# Altium PCB CONTOR.PcbDoc
Units mm, origin at the board's own origin, x right, y up, seen from the top; angles counter-clockwise.
Board outline 100 x 60 mm, 2 copper layers (Top Layer, Bottom Layer); 18 components, 11 nets, 70 pads, 1 vias.
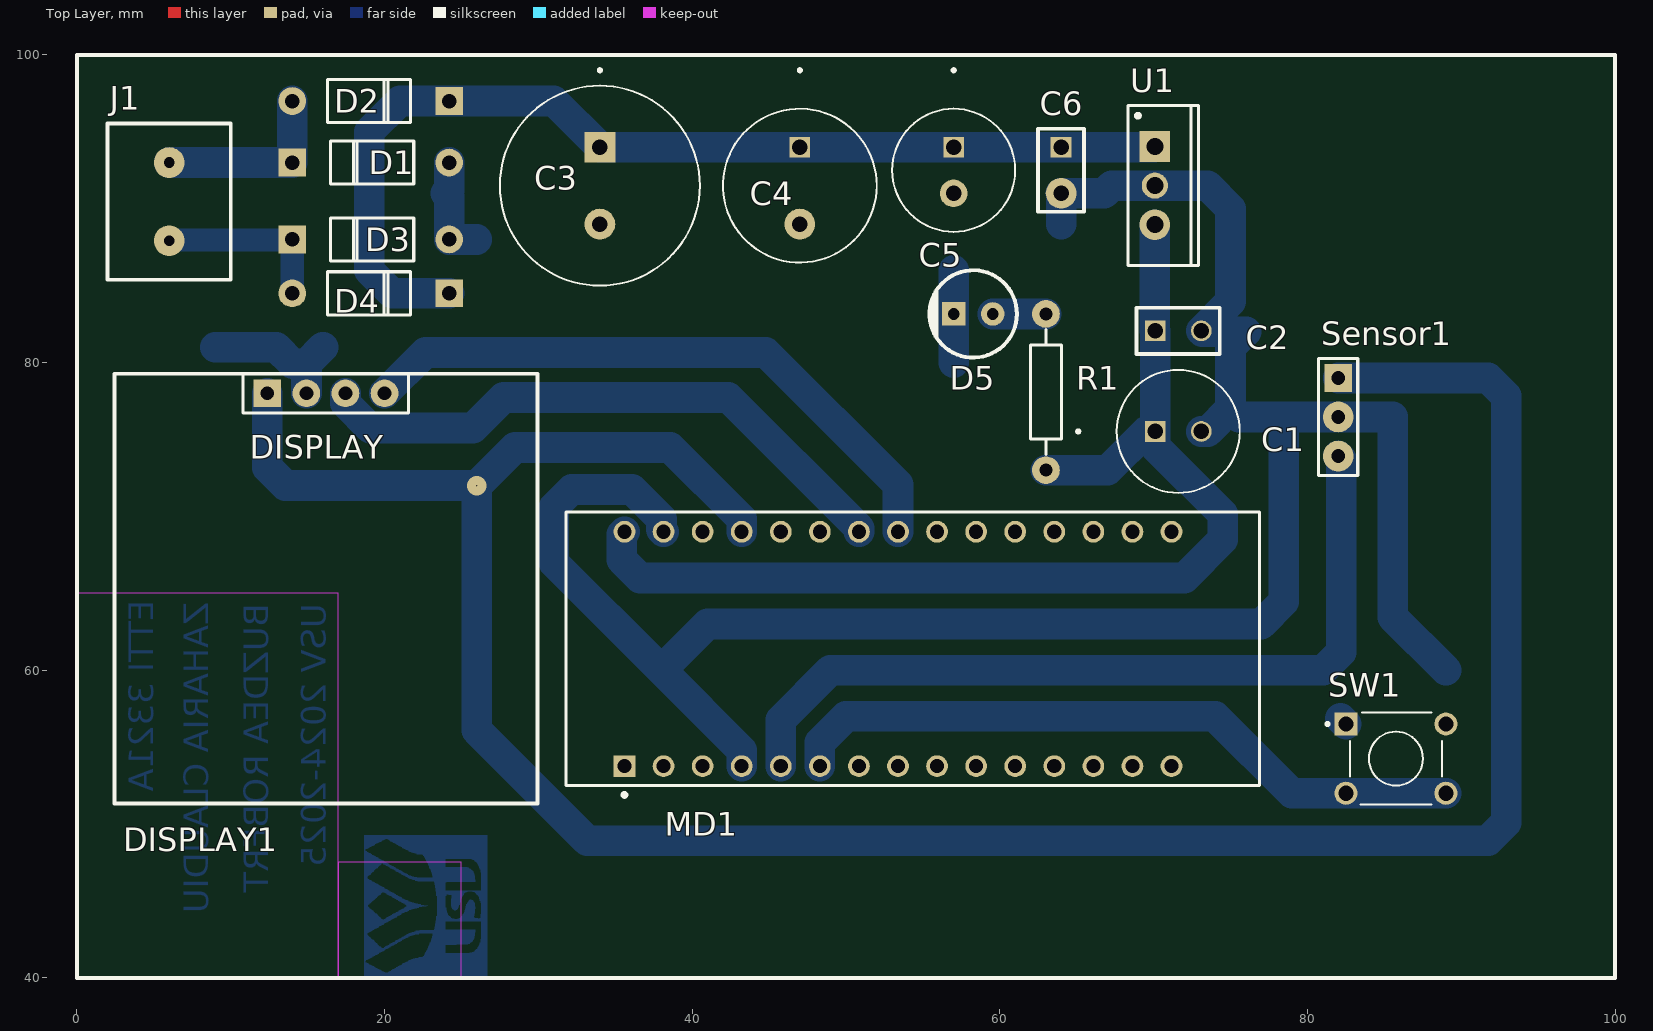
[diagram p0: Top Layer view]
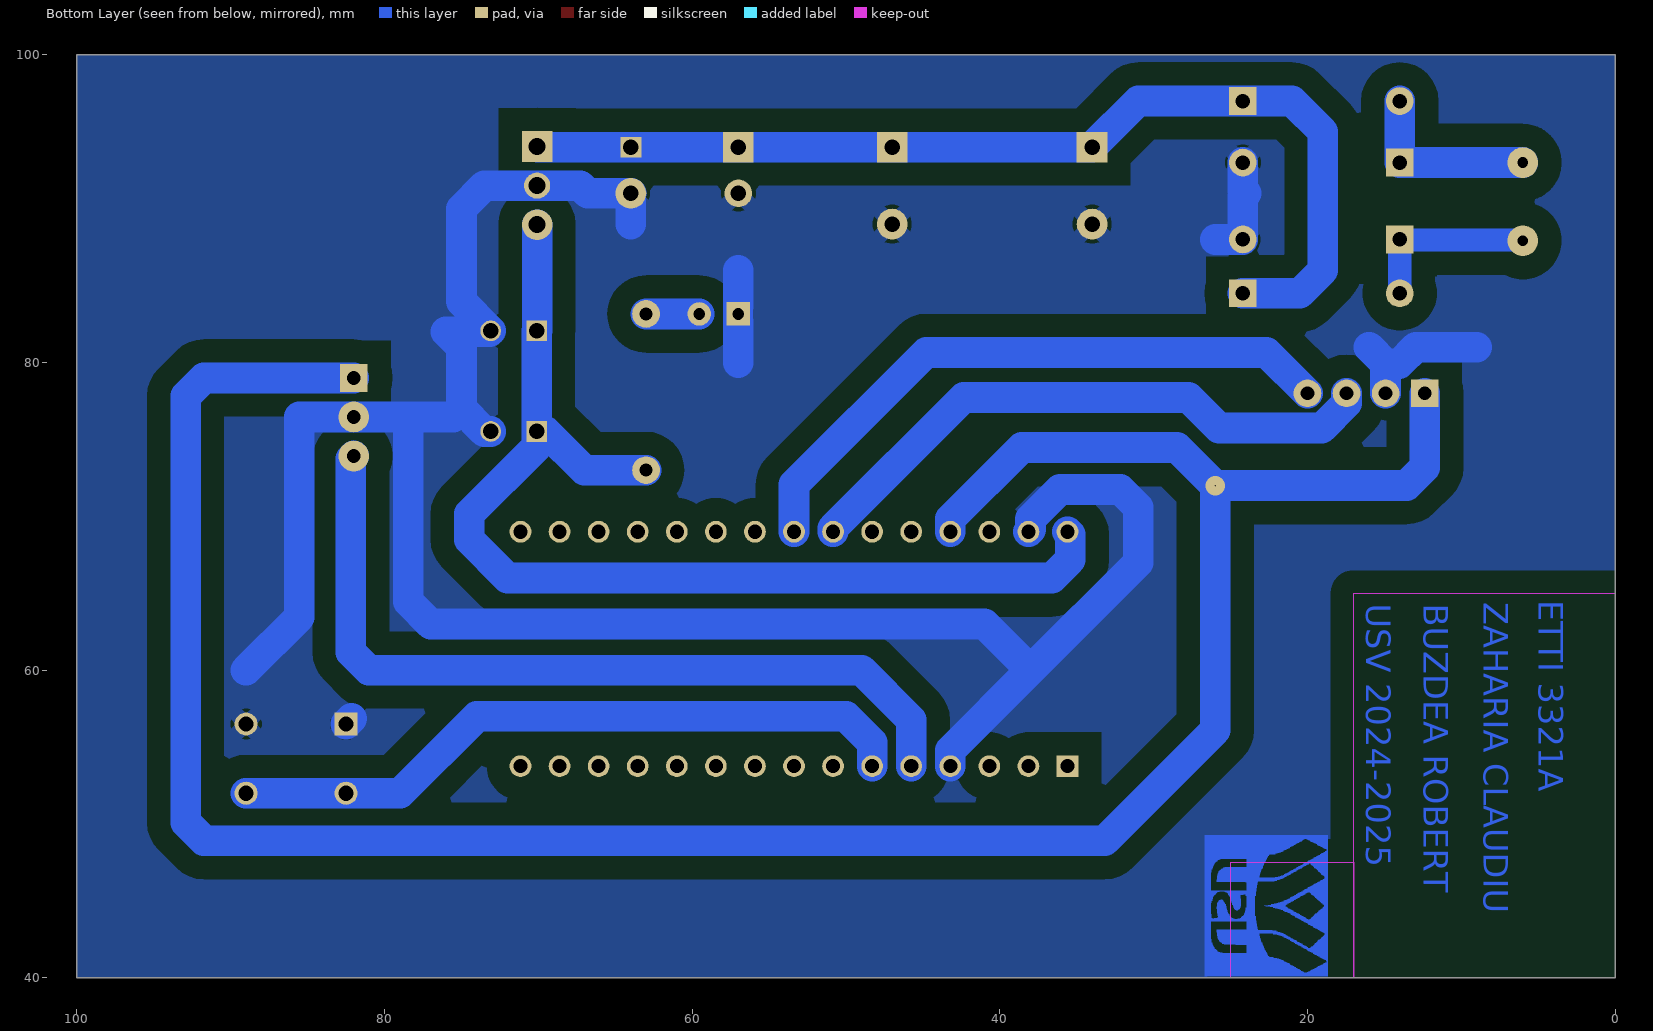
[diagram p1: Bottom Layer view, seen from below]

## Layer stack, top to bottom
Top Solder: solder mask 0.0102, Solder Resist, Dk 3.5
Top Layer: signal copper 0.0356
Dielectric 1: dielectric 0.32, FR-4, Dk 4.8
Bottom Layer: signal copper 0.0356
Bottom Solder: solder mask 0.0102, Solder Resist, Dk 3.5

## Board outline
0,40 0,100 100,100 100,40

## Design rules (kind name [scope] priority, off if disabled: settings)
Clearance [All] p1: gap=0.254 ignorepadtopadclearanceinfootprint=FALSE except(1.5: Arc-Fill Arc-Poly Arc-Region Track-Fill Track-Poly Track-Region SMDPad-Fill SMDPad-Poly SMDPad-Region THPad-Fill THPad-Poly THPad-Region Via-Fill Via-Poly Via-Region Fill-Fill Fill-Poly Fill-Region Poly-Poly Poly-Region Region-Region)
PlaneConnect [All] p1: planeconnectstyle=Relief reliefexpansion=0.8 reliefentries=4 reliefconductorwidth=1 reliefairgap=0.2
PolygonConnect [All] p1: connectstyle=Relief reliefconductorwidth=1 reliefentries=4 polygonreliefangle="45 Angle" airgapwidth=0.254
RoutingVias [All] p1: holewidth=0.711 width=1.27 viastyle="Through Hole" minholewidth=0.711 minwidth=1.27 maxholewidth=0.711 maxwidth=1.27
SolderMaskExpansion [All] p1: expansion=0.102 istentingtop=FALSE
SupplyNets "Schematic Supply Nets_1" [InNet('GND')] p1: voltage=0.000
SupplyNets "Schematic Supply Nets" [InNet('+5V_Stabilizat')] p2: voltage=0.000
Width [All] p1: maxlimit=2 minlimit=0.254 preferedwidth=1.5 toplayer_maxwidth=0.254 toplayer_prefwidth=0.254 bottomlayer_minwidth=0.3 minimp=50.000000 maximp=50.000000 favimp=50.000000
29 further rules are at their usual default settings.

## Components (designator, comment, footprint, x,y, rotation, side; value= is the part's Value field where it differs from the comment)
C1 "2.2uF" "CAPPR 220uF 3mm_pin 8mmcase"#1 71.598,75.523 r0 top
C2 "0.1uF" "CAP104 0.1uF 3mm_pin"#1 71.598,82.059 r0 top
C3 "1000uF" "CAPPR 1000UF 5MM_PIN 13MMCASE" 34,91.5 r270 top
C4 "470uF" "CAPPR 470uF 5mm_pin 10mmcase" 47,91.5 r270 top locked
C5 "220uF" "CAPPR 220uF 3mm_pin 8mmcase"#2 57,92.5 r270 top
C6 "0.1uF" "CAP104 0.1uF 3mm_pin"#2 63.985,92.5 r270 top
D1 "Diode 1N4001" DO-41 14,93 r0 top
D2 "Diode 1N4001" DO-41 24.2,97 r180 top
D3 "Diode 1N4001" DO-41 14,88 r0 top
D4 "Diode 1N4001" DO-41 24.2,84.5 r180 top
D5 "LED" LED 57,83.16 r0 top
DISPLAY1 "128x64OledModule0.96\"" "Oled Display" 16.19,78 r0 top
J1 "6VAC" HDR_1X2_TE 6,93 r0 top
MD1 "A000005" FP-A000005-MFG 54.332,61.38 r90 top
R1 "33k" Resistor_1/4W 63,83.16 r270 top
Sensor1 "IR_Sensor" "SENSOR IR" 82,79 r270 top
SW1 "1825910-6" SW_1825910-6-4 85.75,54.25 r0 top
U1 "L7805CV" TO220 70.077,91.5 r270 top

## Footprints (in the part's own frame and the unit in brackets; to place one, negate y for a bottom-side part, rotate by r counter-clockwise, add the part's x,y. Pads: shape width x height; smd on the part's side, far side on the other; paste and mask are expansions set on the pad)
"CAP104 0.1uF 3mm_pin"#1 [mm] "104 Ceramic cap"
  rect 1.35x1.35 / inner round 1.35 / far side rect 1.35x1.35 hole 1: 1(-1.5,0)
  round 1.35 hole 1: 2(1.5,0)
  silkscreen extent -2.7,-1.5 2.7,1.5
"CAP104 0.1uF 3mm_pin"#2 [mm] "104 Ceramic cap"
  rect 1.35x1.35 / inner round 1.35 / far side rect 1.35x1.35 hole 1: 1(-1.5,0)
  round 2 hole 1: 2(1.5,0)
  silkscreen extent -2.7,-1.5 2.7,1.5
"CAPPR 220uF 3mm_pin 8mmcase"#1 [mm]
  rect 1.35x1.35 / inner round 1.35 / far side rect 1.35x1.35 hole 1: 1(-1.5,0)
  round 1.35 hole 1: 2(1.5,0)
  silkscreen extent -6.6,-4 4,4
"CAPPR 220uF 3mm_pin 8mmcase"#2 [mm]
  rect 1.35x1.35 / inner round 1.35 / far side rect 2x2 hole 1: 1(-1.5,0)
  round 1.8 hole 1: 2(1.5,0)
  silkscreen extent -6.6,-4 4,4
"CAPPR 470uF 5mm_pin 10mmcase" [mm]
  rect 1.35x1.35 / inner round 1.35 / far side rect 2x2 hole 1: 1(-2.5,0)
  round 2 hole 1: 2(2.5,0)
  silkscreen extent -7.6,-5 5,5
"CAPPR 1000UF 5MM_PIN 13MMCASE" [mm]
  rect 2x2 / inner round 1.35 / far side rect 2x2 hole 1: 1(-2.5,0)
  round 2 hole 1: 2(2.5,0)
  silkscreen extent -7.6,-6.5 6.5,6.5
DO-41 [mm]
  round 1.8 hole 0.94: 1(10.2,0)
  rect 1.8x1.8 hole 0.94: 2(0,0)
  silkscreen extent 2.5,-1.4 7.9,1.4
FP-A000005-MFG [mil]
  rect 55.67x55.67 hole 35.98 paste-99999 mask+0: 1(-300,737.5)
  round 55.67 hole 35.98 paste-99999 mask+0: 2(-300,637.5) 3(-300,537.5) 4(-300,437.5) 5(-300,337.5) 6(-300,237.5) 7(-300,137.5) 8(-300,37.5) 9(-300,-62.5) 10(-300,-162.5) 11(-300,-262.5) 12(-300,-362.5) 13(-300,-462.5) 14(-300,-562.5) 15(-300,-662.5) 16(300,-662.5) 17(300,-562.5) 18(300,-462.5) 19(300,-362.5) 20(300,-262.5) 21(300,-162.5) 22(300,-62.5) 23(300,37.5) 24(300,137.5) 25(300,237.5) 26(300,337.5) 27(300,437.5) 28(300,537.5) 29(300,637.5) 30(300,737.5)
  silkscreen extent -379,-888 350,888, body extent -354,-891 354,891, height 10
HDR_1X2_TE [mm] "282836-2"
  round 2 hole 0.7: 1(0,0) 2(0,-5.08)
  silkscreen extent -4,-7.62 4,2.54
LED [mil]
  rect 60x60 hole 30: 1(0,0)
  round 60 hole 30: 2(100,0)
  silkscreen extent -62,-112 162,112
"Oled Display" [mm]
  rect 1.8x1.8 hole 0.9: 1(-3.81,0)
  round 1.8 hole 0.9: 2(-1.27,0) 3(1.27,0) 4(3.81,0)
  silkscreen extent -13.75,-26.67 13.75,1.27
Resistor_1/4W [mm] "Res_2mm_AxialTH"
  round 1.8 hole 0.85: 1(0,0) 2(10.16,0)
  silkscreen extent 1.02,-1.02 9.14,1.02
"SENSOR IR" [mm]
  rect 1.8x1.8 hole 0.9: 1(0,0)
  round 2 hole 0.9: 2(2.54,0) 3(5.08,0)
  silkscreen extent -1.27,-1.27 6.35,1.27
SW_1825910-6-4 [mm]
  rect 1.498x1.498 / inner round 1.498 / far side rect 1.498x1.498 hole 0.99: 1(-3.25,2.25)
  round 1.498 hole 0.99: 2(3.25,2.25) 3(-3.25,-2.25) 4(3.25,-2.25)
  silkscreen extent -4.54,-3 3,3, body extent -3.9,-3 3.9,3, height 5.01
TO220 [mm] "TO, Thru-Hole, Vertical, Heatsink Mounted; 3 In-Line Leads; Pitch 2.54 mm"
  rect 2x2 hole 1.1: 1(-2.54,0)
  round 1.7 hole 1.1: 2(0,0)
  round 2 hole 1.1: 3(2.54,0)
  silkscreen extent -5.2,-1.75 5.2,2.85, body extent -5.25,-1.8 5.25,2.9, height 19.7

## Part data
C1: library part "2.2uF Cap", "Polarized Capacitor (Radial)", LatestRevisionDate=17-Jul-2002, LatestRevisionNote="Re-released for DXP Platform.", PackageDescription="Polarized Capacitor (Radial); 2 Leads", PackageReference=RB7.6-15, Published=8-Jun-2000, Publisher="Altium Limited"
C2 C6: library part CAP, "104 cap"
C3: library part "1000uF Cap", "Polarized Capacitor (Radial)", LatestRevisionDate=17-Jul-2002, LatestRevisionNote="Re-released for DXP Platform.", PackageDescription="Polarized Capacitor (Radial); 2 Leads", PackageReference=RB7.6-15, Published=8-Jun-2000, Publisher="Altium Limited"
C4: library part "470uF Cap", "Polarized Capacitor (Radial)", LatestRevisionDate=17-Jul-2002, LatestRevisionNote="Re-released for DXP Platform.", PackageDescription="Polarized Capacitor (Radial); 2 Leads", PackageReference=RB7.6-15, Published=8-Jun-2000, Publisher="Altium Limited"
C5: library part "220uF Cap", "Polarized Capacitor (Radial)", LatestRevisionDate=17-Jul-2002, LatestRevisionNote="Re-released for DXP Platform.", PackageDescription="Polarized Capacitor (Radial); 2 Leads", PackageReference=RB7.6-15, Published=8-Jun-2000, Publisher="Altium Limited"
D1 D2 D3 D4: "1 Amp General Purpose Rectifier", Code_JEDEC=DO-204-AL, ComponentLink1Description="Manufacturer Link", ComponentLink1URL=http://www.fairchildsemi.com/, ComponentLink2Description=Datasheet, ComponentLink2URL=http://www.fairchildsemi.com/ds/1N%2F1N4001.pdf, DatasheetVersion=1998, LatestRevisionDate=17-Jul-2002, LatestRevisionNote="Re-released for DXP Platform.", PackageDescription="Diode, Axial; Body 5.2 x 2.7 mm (LxDia. max), Lead Dia. 0.86 mm (max)", PackageReference=DO-41, PackageVersion=Aug-1999, Published=8-Jun-2000, Publisher="Altium Limited"
DISPLAY1: library part 0.96INCH_OLED_DISPLAY, "OLED 4 Pin 128*64 Display Module 0.96” Blue Color"
J1: library part CON_1x2, "Connector, 2-Ports"
MD1: library part CMP-189986-000002-1, "ARDUINO NANO ATMEGA328 EVAL BRD", Operating Supply Voltage=12V, Package Quantity=50, Core Architecture=AVR, Data Bus Width=8b, Evaluation Kit=Yes, Height=0.25inch, Interface=I2C, Length=7inch, Number of Bits=8, Packaging=Bulk, REACH SVHC="No SVHC", Series="AVR® ATmega", Weight=0.358383oz, Width=5inch
R1: library part "Resistor 0.25W 5mm", "0.25W,Axial"
Sensor1: "IR_SENSOR"
SW1: "Switch Push Button OFF (ON) SPST Round Button 0.05A 24VDC Momentary Contact PC Pins Thru-Hole", Package=None, Check_prices=https://www.snapeda.com/parts/1825910-6/TE+Connectivity+ALCOSWITCH+Switches/view-part/?ref=eda, Digi-Key_Part_Number=450-1650-ND, MF="TE Connectivity", MP=1825910-6, Purchase-URL=https://pricing.snapeda.com/search/part/1825910-6/?ref=eda, SnapEDA_Link=https://www.snapeda.com/parts/1825910-6/TE+Connectivity+ALCOSWITCH+Switches/view-part/?ref=snap
U1: library part CMP-0244-00483-1, "Positive Voltage Regulator, 5V, 3-Pin TO-220", ComponentLink1Description="Manufacturer URL", ComponentLink1URL=http://www.st.com, ComponentLink2Description=Datasheet, ComponentLink2URL=http://www.st.com/internet/com/TECHNICAL_RESOURCES/TECHNICAL_LITERATURE/DATASHEET/CD00000444.pdf, ComponentLink3Description="Package Specification", ComponentLink3URL=http://www.st.com/internet/com/TECHNICAL_RESOURCES/TECHNICAL_LITERATURE/PACKAGE_INFORMATION/CD00004649.pdf, DatasheetVersion=16/11/2011, PackageDescription="TO, Thru-Hole, Vertical, Heatsink Mounted; 3 In-Line Leads; Pitch 2.54 mm", PackageReference=TO220, PackageVersion=ver3.0

## Via types
v1: diameter 1.27, hole 0.1, Top Layer to Bottom Layer, 1 vias

## Nets (pads, with @x,y where several pads share a name; then routed paths per layer and width w, separated by ;. In a path a pad name is that pad's centre, name@x,y a point inside that pad or via, vN(x,y) a via of type N, cw(c..) or ccw(c..) an arc to the next point about the centre after c; other vN are vias at no path point)
6-7.5V_Redresat: C3.1 C4.1 C5.1 C6.1 D2.2 D4.2 U1.1 | length 68
  Bottom Layer w2: D4.2 20.5,84.5 19,86 19,95 21,97 D2.2 31,97 C3.1 C4.1 C5.1 C6.1 70.037,94 U1.1
+5V_Stabilizat: C1.1 C2.1 MD1.30 R1.2 U1.3 | length 72.9
  Bottom Layer w2: MD1.30 35.428,68.828 35.428,67.172 36.6,66 72,66 74.496,68.496 74.496,70.153 70.098,74.55 C1.1 ; R1.2 67,73 69.523,75.523 C1.1 ; U1.3 70.077,82.081 C2.1 C1.1
GND: C1.2 C2.2 C3.2 C4.2 C5.2 C6.2 D1.1 D3.1 D5.1 DISPLAY1.2 MD1.4 MD1.29 Sensor1.2 SW1.1 SW1.2 U1.2 | length 170.7
  Bottom Layer w2: 9,81 12.953,81 14.033,79.92 14.92,79.92 ; DISPLAY1.2 14.92,79.92 ; 16,81 14.92,79.92 ; D1.1 24.2,91.2 24,91 24.2,90.8 D3.1 26,88 ; MD1.29 38,69.14 38,69.828 36.082,71.746 32.172,71.746 31,70.574 31,67 38,60 ; MD1.4 43.22,54.78 38,60 ; 57,80 D5.1 57,86 ; 64,89 64,90.985 C6.2 66.781,91 67.281,91.5 U1.2 73.5,91.5 75,90 75,83.961 C2.2 73.158,82 76,82 75,81 75,77 ; C1.2 73.523,75.523 75,77 ; SW1.1@82.146,56.854 SW1.1 ; 89,60 85.54,63.46 85.54,76.46 Sensor1.2 78.46,76.46 ; 38,60 41,63 77,63 78.46,64.46 78.46,76.46 ; 75,77 75.54,76.46 78.46,76.46
IR_OUT: MD1.5 Sensor1.3 | length 54.1
  Bottom Layer w2: MD1.5 45.76,56.76 49,60 81.027,60 82.199,61.172 82.199,73.721 Sensor1.3
NetD1_2: D1.2 D2.1 J1.1 | length 12
  Bottom Layer w2: J1.1 D1.2 D2.1
NetD3_2: D3.2 D4.1 J1.2 | length 11.5
  Bottom Layer w1.5: J1.2 6.04,87.96 13.96,87.96 D3.2 D4.1
NetD5_2: D5.2 R1.1 | length 3.5
  Bottom Layer w2: D5.2 R1.1
NetDISPLAY1_1: DISPLAY1.1 MD1.27 Sensor1.1 | length 165.4
  Bottom Layer w2: DISPLAY1.1 12.38,73.172 13.552,72 v1(26,72) ; MD1.27 43.22,69.828 38.57,74.479 28.479,74.479 v1(26,72) ; Sensor1.1 91.746,79 92.918,77.828 92.918,50.089 91.746,48.918 33.172,48.918 26,56.089 v1(26,72)
NetMD1_6: MD1.6 SW1.3 SW1.4 | length 45
  Bottom Layer w2: MD1.6 48.3,55.3 50,57 74,57 79,52 SW1.3 SW1.4
SCL: DISPLAY1.3 MD1.24 | length 39.3
  Bottom Layer w2: DISPLAY1.3 17.46,77.352 19.066,75.746 25.746,75.746 27.727,77.727 42.347,77.727 50.84,69.233 MD1.24
SDA: DISPLAY1.4 MD1.23 | length 41.1
  Bottom Layer w2: DISPLAY1.4 22.661,80.661 44.785,80.661 53.38,72.066 MD1.23
pads on no net: MD1.1 MD1.2 MD1.3 MD1.7 MD1.8 MD1.9 MD1.10 MD1.11 MD1.12 MD1.13 MD1.14 MD1.15 MD1.16 MD1.17 MD1.18 MD1.19 MD1.20 MD1.21 MD1.22 MD1.25 MD1.26 MD1.28

## Polygon pours and split planes (outlines as drawn)
GND on Bottom Layer "GND_L02_P000" (solid, pour order 0): 0,100 100,100 100,40 0,40

## Keep-outs
Keep-Out Layer:
  rectangle: 17,40 25,47.529
  rectangle: 0,40 17,65

## Other copper
Bottom Layer:
  region net GND: 5 vertices and 7 holes, not listed, extent 18.671,40.093 26.671,49.28
  text "ETTI 3321A" at 4.975,64.55 h1.6 r90
  text "ZAHARIA CLAUDIU" at 8.55,64.4 h1.6 r90
  text "BUZDEA ROBERT" at 12.45,64.325 h1.6 r90
  text "USV 2024-2025" at 16.175,64.325 h1.6 r90

## Silkscreen, mask and mechanical layers (free items; w line width, h text height)
Top Overlay:
  the board outline again, w0.254

## Text inside footprints (layer, text, board x,y; h text height)
DISPLAY1: Top Overlay "DISPLAY" at 11.254,73.754 h1.52